# Altium PCB Basic Arduino Shield.PcbDoc
Units mil, origin at the board's own origin, x right, y up, seen from the top; angles counter-clockwise.
Board outline 555.12 x 661.42 mil, 2 copper layers (Top Layer, Bottom Layer); 4 components, 8 nets, 22 pads, 0 vias.
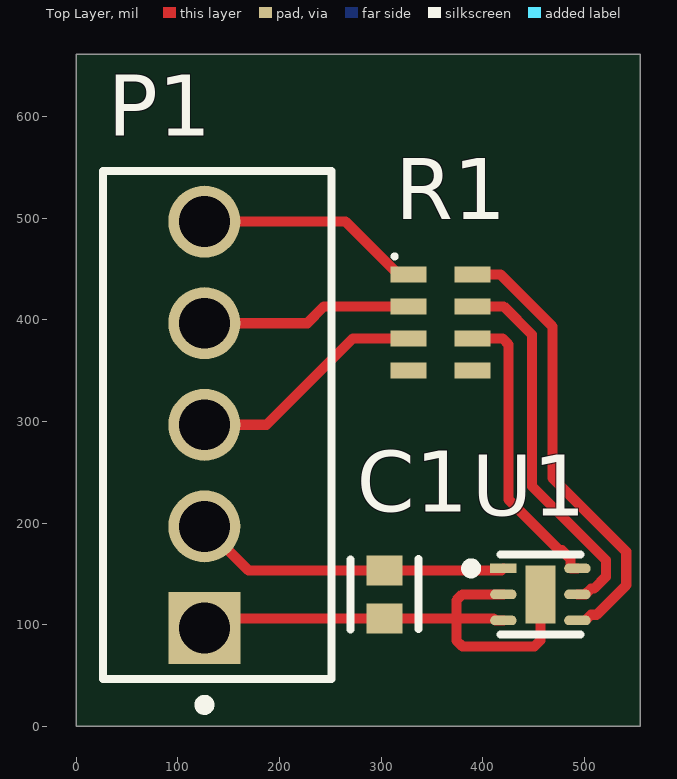
[diagram p0: Top Layer view]
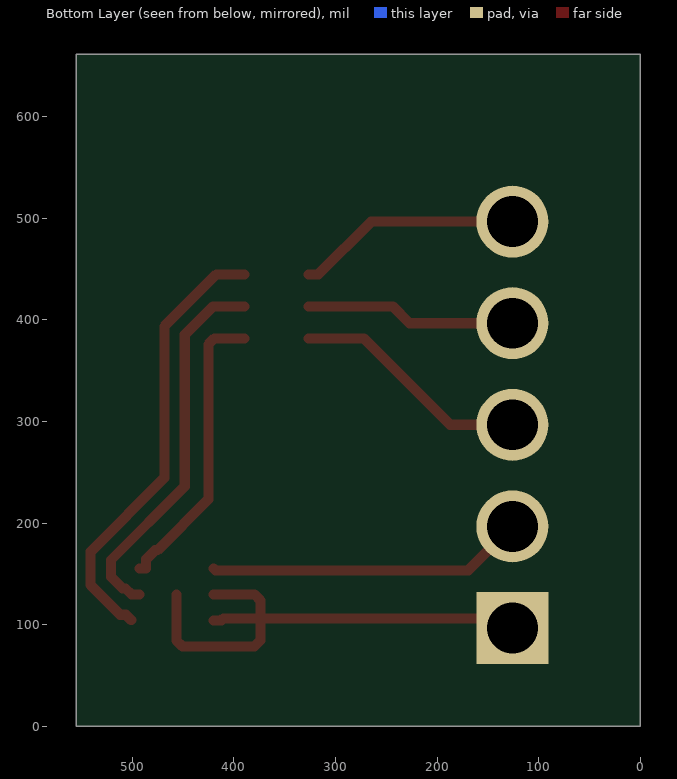
[diagram p1: Bottom Layer view, seen from below]
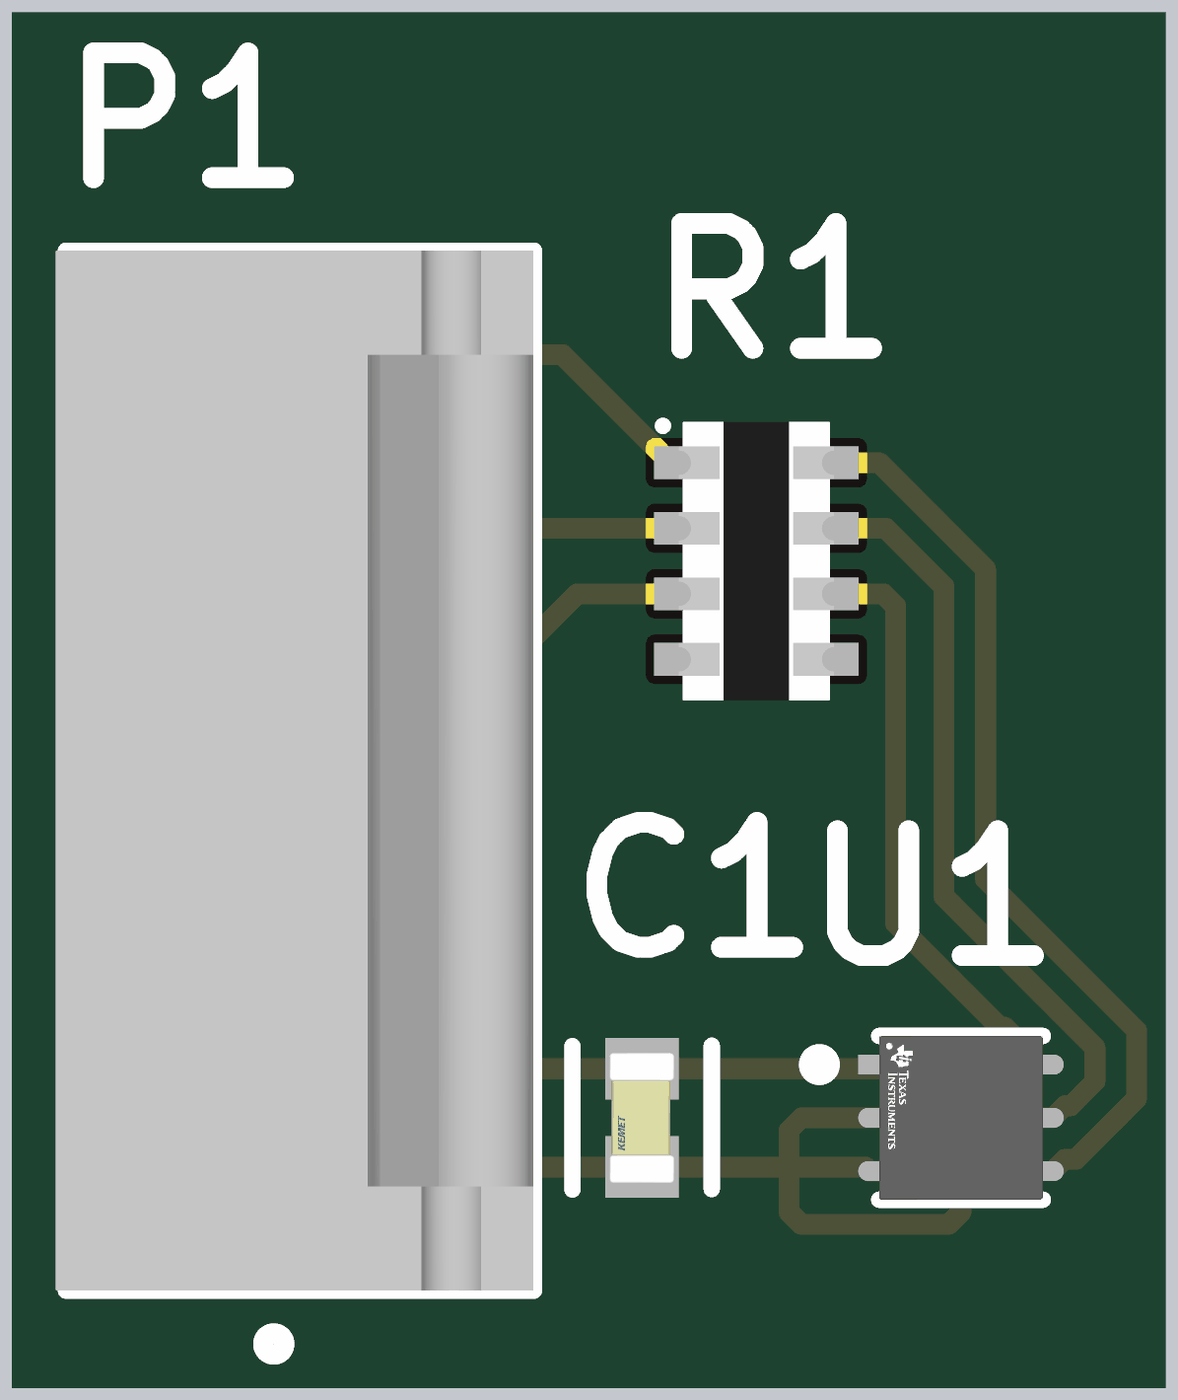
[diagram p2: 3D render of the assembled board from above, using the file's embedded part models]

## Layer stack, top to bottom
Top Solder: solder mask 0.4, Solder Resist, Dk 3.5
Top Layer: signal copper 1.4
Dielectric 1: dielectric 12.6, FR-4, Dk 4.8
Bottom Layer: signal copper 1.4
Bottom Solder: solder mask 0.4, Solder Resist, Dk 3.5

## Board outline
0,0 555.12,0 555.12,661.42 0,661.42

## Design rules (kind name [scope] priority, off if disabled: settings)
Clearance [All] p1: gap=10 ignorepadtopadclearanceinfootprint=FALSE except(0: Arc-Hole Track-Hole SMDPad-Hole THPad-Hole Via-Hole Fill-Hole Poly-Hole Region-Hole Text-Hole)
PolygonConnect [All] p1: connectstyle=Relief reliefconductorwidth=10 reliefentries=4 polygonreliefangle="90 Angle" airgapwidth=10
RoutingVias [All] p1: holewidth=28 width=50 viastyle="Through Hole" minholewidth=28 minwidth=50 maxholewidth=28 maxwidth=50
SolderMaskExpansion [All] p1: expansion=4 istentingtop=FALSE
Width [All] p1: maxlimit=10 minlimit=10 preferedwidth=10
30 further rules are at their usual default settings.

## Components (designator, comment, footprint, x,y, rotation, side; value= is the part's Value field where it differs from the comment)
C1 "1p" FP-C0603C-CF-MFG 303.15,129.92 r90 top value="1.0 pF"
P1 "640456-5" TECO-640456-5 125.98,296.85 r270 top
R1 "10k" BOUR-CAT16-103J4LF_L 358.27,397.64 r0 top
U1 "OPT3001DNPT" FP-DNP0006A-IPC_C 456.69,129.92 r0 top

## Footprints (in the part's own frame and the unit in brackets; to place one, negate y for a bottom-side part, rotate by r counter-clockwise, add the part's x,y. Pads: shape width x height; smd on the part's side, far side on the other; paste and mask are expansions set on the pad)
BOUR-CAT16-103J4LF_L [mm] "Chip Array, 8-Leads, Body 3.4x1.6mm, Pitch 0.8mm, IPC High Density"
  rect 0.9x0.4 smd: 1(-0.8,1.2) 2(-0.8,0.4) 3(-0.8,-0.4) 4(-0.8,-1.2) 5(0.8,-1.2) 6(0.8,-0.4) 7(0.8,0.4) 8(0.8,1.2)
  silkscreen extent -1.19,1.6 -1.09,1.7, body extent -0.95,-1.7 0.95,1.7, height 0.6
FP-C0603C-CF-MFG [mm]
  rect 0.75x0.9 smd paste+0 mask+0: 1(-0.6,0) 2(0.6,0)
  silkscreen extent -0.88,-0.85 0.88,0.85, body extent -1.2,-0.6 1.2,0.6, height 0.25
FP-DNP0006A-IPC_C [mm]
  rect 0.661x0.242 smd paste+0 mask+0: 1(-0.926,0.65)
  rrect100% 0.661x0.242 smd paste+0 mask+0: 2(-0.926,0) 3(-0.926,-0.65) 4(0.925,-0.65) 5(0.925,0) 6(0.925,0.65)
  rect 0.75x1.45 smd paste-1000 mask+0: 7(0,0)
  silkscreen extent -1.86,-1 1,1, body extent -1.36,-1.1 1.36,1.1, height 0.25
TECO-640456-5 [mm] "Through Hole, 5-Leads, Body 12.7x5.72mm, Pitch 2.54mm"
  rect 1.8x1.8 hole 1.27 paste+0: 1(5.08,0)
  round 1.8 hole 1.27 paste+0: 2(2.54,0) 3(0,0) 4(-2.54,0) 5(-5.08,0)
  silkscreen extent -6.35,-2.54 7.13,3.18, body extent -6.35,-2.67 6.35,3.18, height 10.29

## Part data
C1: library part CMP-2006-03328-2, "CAP CER 1PF 50V C0G/NP0 0603 straight male header", Capacitance="1.0 pF", Manufacturer=KEMET, Manufacturer Part Number=C0603C109C5GACTU, Package=C0603C-CF, Temperature="-55°C to +125°C", Temperature Characteristic=C0G, Temperature Coefficient=30ppm/°C, Temperature Range High=+125°C, Temperature Range Low=-55°C, Tolerance="0.25 pF", Voltage Rating="50 V", Automotive=Yes, Automotive Grade="Grade 1", Category=Cap, ComponentLink2Description=Datasheet, ComponentLink2URL=https://api.kemet.com/component-edge/download/datasheet/C0603C100J5GACAUTO.pdf, Device Class L1="Passive Components", Device Class L2=Capacitors, Device Class L3="Ceramic Capacitors", Digikey Description="CAP CER 1PF 50V C0G/NP0 0603", Height=0.87mm, Lead Free=Yes, Material=Ceramic, Mouser Description="Multilayer Ceramic Capacitors MLCC - SMD/SMT 50volts 1.0pF C0G 0.25%", Octopart=https://octopart.com/c0603c109c5gactu-kemet-107248, RoHS=TRUE
P1: library part CMP-1684-00014-1, "Male Header, Pitch 2.54 mm, 1 x 5 Position, Height 10.03 mm, Tail Length 3.56 mm,  / -55 to 105 degC, RoHS, Bulk", Color=White, Current, Rating="5 /  / A", Flammability Rating=UL94V-0, Manufacturer="TE Connectivity", Package Description="Male Header, Pitch 2.54 mm, 1 x 5 Position, Height 10.03 mm, Tail Length 3.56 mm", Package Reference=THD, Temperature, Operating="-55to+105 /  / °C", Voltage, Rating="250 /  / V", Agency Approvals=CSA,UL, Angle=Straight, Brand/Series=MTA-100Series, Color, Housing=White, Connector Type=MTA-100, Contact Centerline Spacing="0.100 /  / in.", Contact Mating Area Plating=Tin, Contact Plating=Tin, Contact Shape=Square, Contact Termination Area Plating=Tin, Datasheet URL=http://sigma.octopart.com/77881742/technical_drawing/TE-Connectivity-640456-5.pdf, Datasheet Version="Rev. W3", Length, Overall="0.5 /  / \"", Length, Pin="0.14 /  / \"", Length, Terminal Post="0.14 /  / in.", Manufacturer URL=http://www.te.com, Material, Contact=CopperAlloy, Material, Housing=Polyester, Mount Angle=Vertical, Mounting Hole Size="0.04 /  / \"", Mounting Type=PCMount, Number of Contacts=5, Number of Positions=5, Number of Rows=1, Pin Spacing="0.1 /  / \"", Primary Type=InterconnectSystem, Size, Post="0.025 /  / in.", Special Features=Pinstrip, Standards=RoHSCompliant,ELVCompliant,UL94V-0, Termination=Solder, Type=PCBPlug
R1: library part CMP-2000-06067-1, "CAT / CAY 16 Series - Chip Resistor Array, 10 KOhm, +/- 5%, 50 V, -55 to 125 degC, 8-Pin SMD, RoHS, Tape and Reel CAT16-103J4LF", Manufacturer=Bourns, Number of Resistors=4, Operating Temperature=-55°C~125°C, Package / Case=1206(3216Metric),Concave,LongSideTerminals, Package Description="8-Pin Surface Mount Device, Body 3.2 x 1.55 mm, Pitch 0.8 mm", Package Reference=CAT16-103J4LF, Power Per Element=62.5mW, Standard Package=1, Supplier Device Package=1206, Temperature Coefficient=±200ppm/°C, Tolerance=±5%, Applications=-, Category=Resistors, Circuit Type=Isolated, Datasheet URL=http://www.mouser.com/ds/2/54/ATCAY-777361.pdf, Datasheet Version=09/2014, EDA / CAD Models=DownloadfromAcceleratedDesigns, Family=ResistorNetworks,Arrays, Height="0.024\"(0.60mm)", Manufacturer URL=http://www.bourns.com/, Mounting Technology=SurfaceMount, Mounting Type=SurfaceMount, Number of Pins=8, Online Catalog=CAT16Series, Other Names=CAT16-103J4LFDKR, Packaging=Digi-Reel®, Resistance (Ohms)=10k, RoHS Information=CAT16MaterialDeclaration, Series=CAT16, Size / Dimension="0.126\"Lx0.061\"W(3.20mmx1.55mm)"
U1: library part CMP-2000-06867-2, "SENSOR OPT 550NM AMBIENT 6USON", Max Frequency=2.6MHz, Max Operating Temperature=85°C, Max Supply Voltage=3.6V, Min Operating Temperature=-40°C, Min Supply Voltage=1.6V, Contact Plating=Gold, Interface=I2C, Lead Free="Lead Free", Mount="Surface Mount", Number of Pins=6, Output Type=I2C, Packaging="Cut Tape", REACH SVHC="No SVHC", Sensing Method=Optical, Wavelength=550nm

## Nets (pads, with @x,y where several pads share a name; then routed paths per layer and width w, separated by ;. In a path a pad name is that pad's centre, name@x,y a point inside that pad or via, vN(x,y) a via of type N, cw(c..) or ccw(c..) an arc to the next point about the centre after c; other vN are vias at no path point)
BYPASS: C1.1 P1.1 U1.2 U1.3 U1.7 | length 520
  Top Layer w10: P1.1 135.43,106.3 C1.1 374.02,106.3 ; U1.3 412.47,104.33 410.5,106.3 374.02,106.3 ; U1.2 379.87,129.92 374.02,124.06 374.02,106.3 ; U1.7 456.69,84.6 450.83,78.74 379.87,78.74 374.02,84.6 374.02,106.3
INT: P1.4 R1.2 | length 207.6
  Top Layer w10: P1.4 227.25,396.85 243.78,413.39 R1.2
NetR1_6: R1.6 U1.6 | length 291.8
  Top Layer w10: R1.6 419.34,381.89 425.2,376.03 425.2,223.45 475.18,173.46 477.67,173.46 486.46,164.68 486.46,155.74 486.68,155.51 U1.6
NetR1_7: R1.7 U1.5 | length 373.7
  Top Layer w10: R1.7 420.53,413.39 448.5,385.42 448.5,236.34 521.14,163.7 521.14,147.32 509.56,135.74 507.19,135.74 506.74,135.74 500.92,129.92 U1.5
NetR1_8: R1.8 U1.4 | length 439
  Top Layer w10: R1.8 417.32,444.88 468.5,393.7 468.5,244.63 541.14,171.99 541.14,139.04 512.03,109.92 506.51,109.92 U1.4@501.14,104.56
SCL: P1.5 R1.1 | length 222.3
  Top Layer w10: P1.5 264.96,496.85 316.93,444.88 R1.1
SDA: P1.3 R1.3 | length 236
  Top Layer w10: P1.3 187.17,296.85 272.21,381.89 R1.3
VCC: C1.2 P1.2 U1.1 | length 313
  Top Layer w10: P1.2 169.29,153.54 C1.2 418.28,153.54 U1.1
pads on no net: R1.4 R1.5